# Altium PCB liuyang.PcbDoc (part 1 of 2)
Units mm, origin at the board's own origin, x right, y up, seen from the top; angles counter-clockwise.
Board outline 90.52 x 68.02 mm, 2 copper layers (Top Layer, Bottom Layer); 126 components, 27 nets, 696 pads, 498 vias.
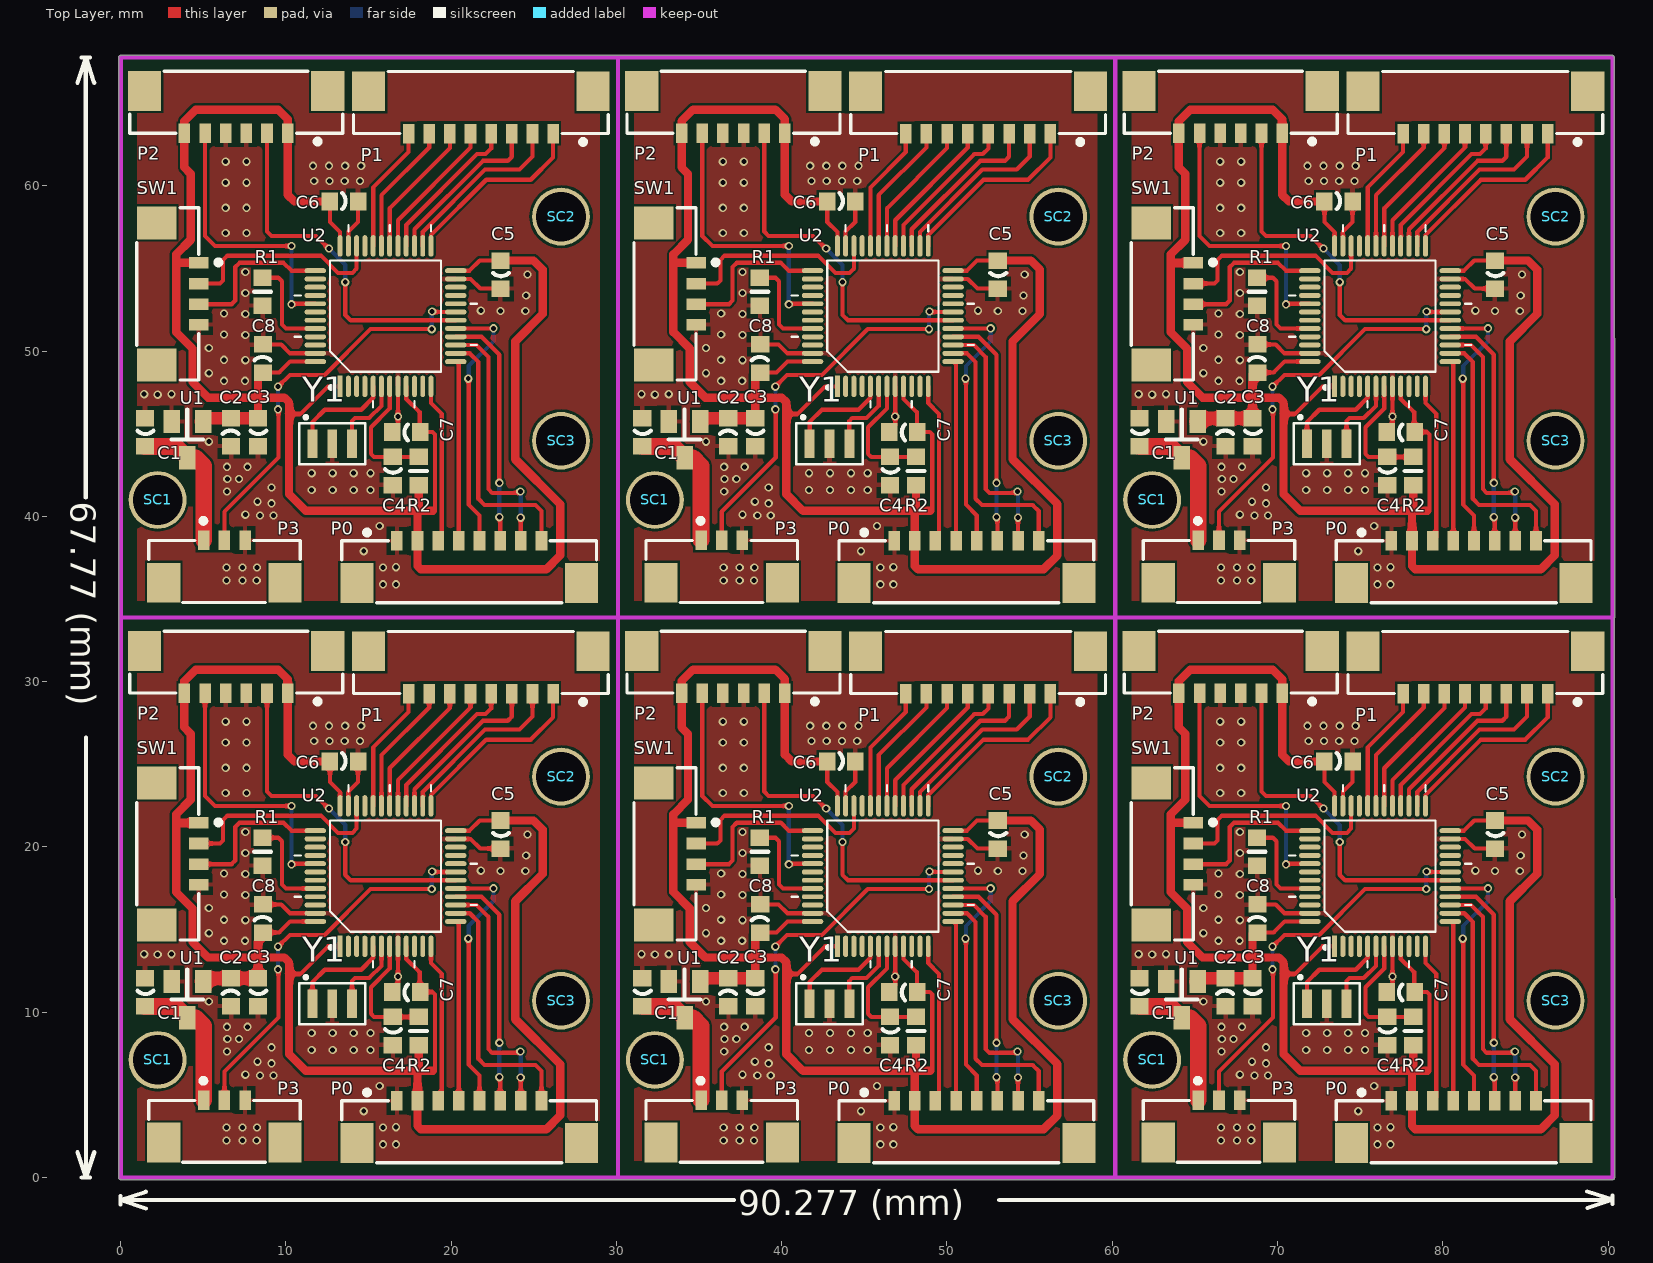
[diagram p0: Top Layer view]
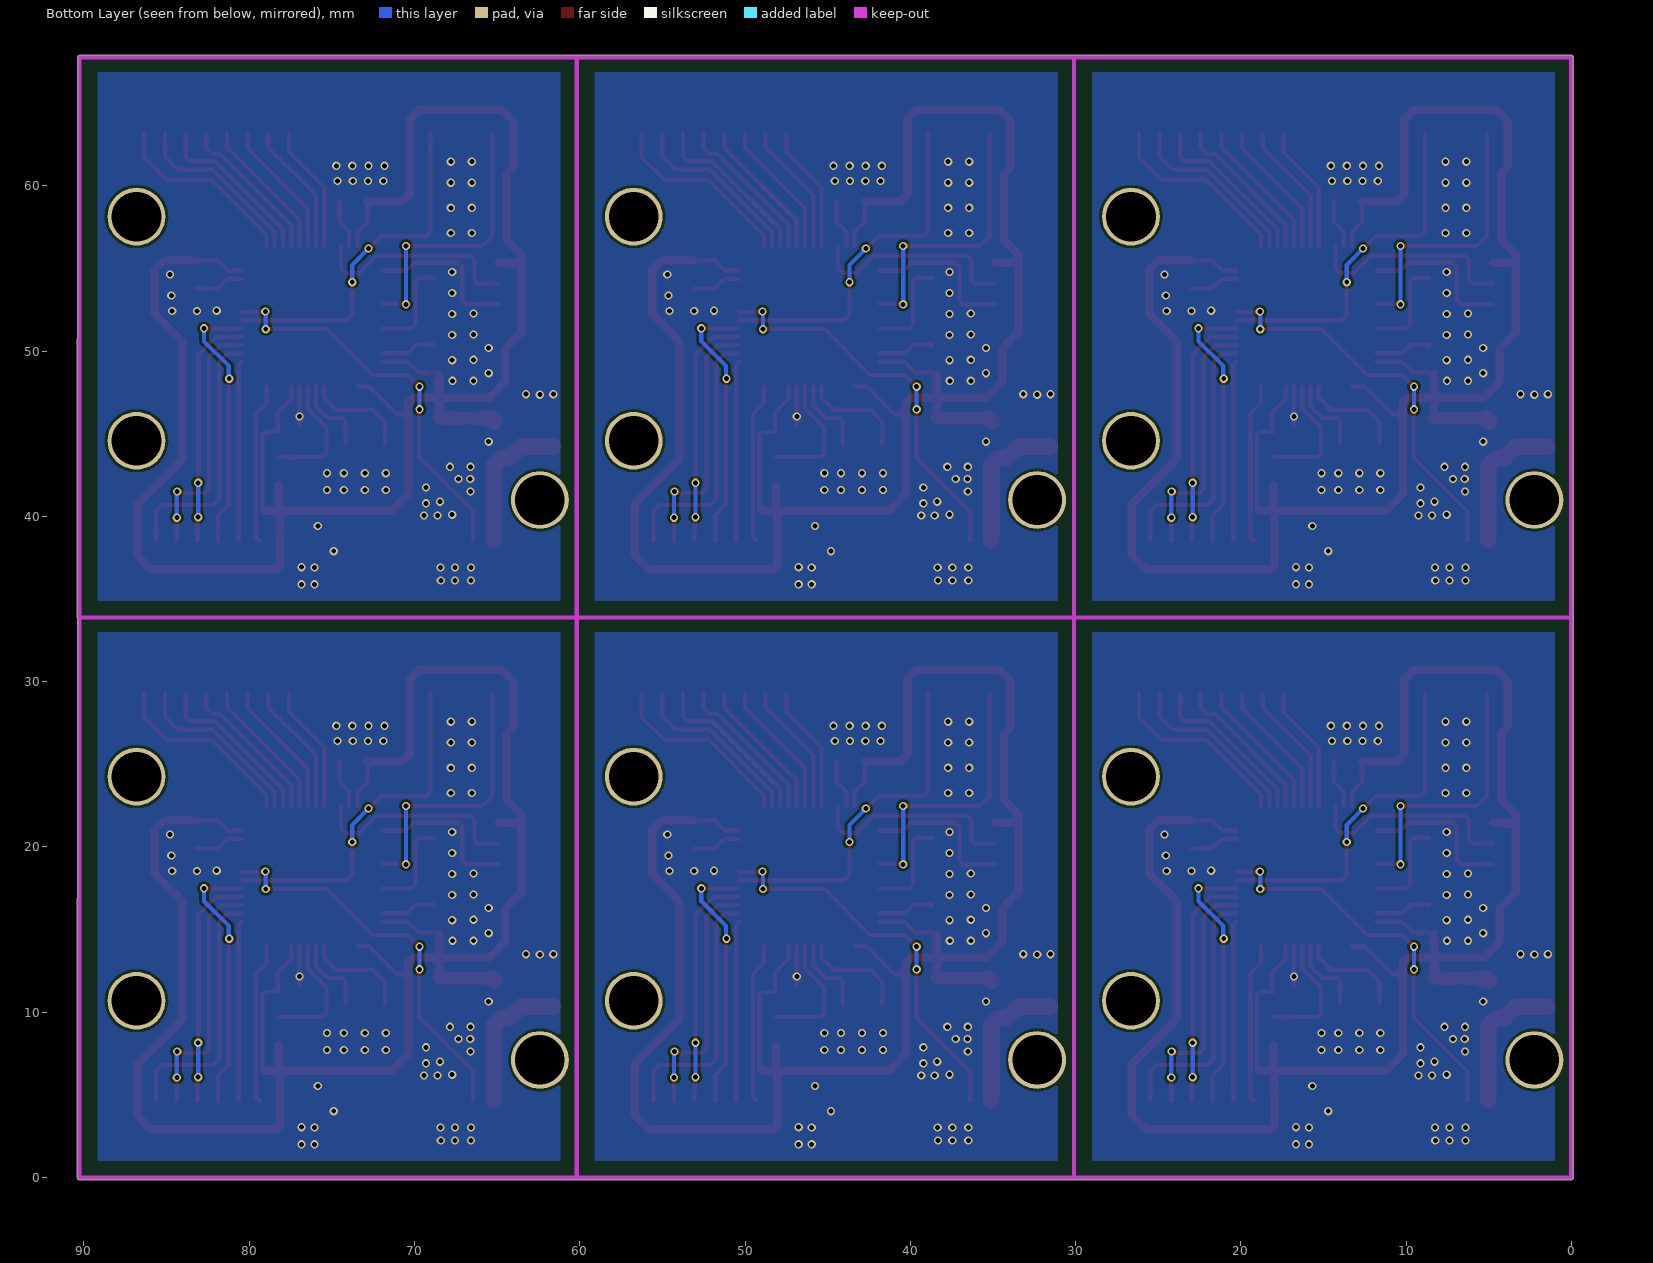
[diagram p1: Bottom Layer view, seen from below]

## Layer stack, top to bottom
Top Solder: solder mask 0.0102, Solder Resist, Dk 3.5
Top Layer: signal copper 0.0356
Dielectric 1: dielectric 0.32, FR-4, Dk 4.8
Bottom Layer: signal copper 0.0356
Bottom Solder: solder mask 0.0102, Solder Resist, Dk 3.5

## Board outline
-0.127,0 ccw(c0,0) 0,-0.127 90.266,-0.127 ccw(c90.266,0) 90.393,0 ccw(c90.266,0) 90.393,0 90.37,33.81 ccw(c90.266,33.884) 90.393,33.884 ccw(c90.266,33.884) 90.393,33.884 90.37,67.767 ccw(c90.242,67.767) 90.242,67.895 60.177,67.895 ccw(c60.177,67.767) 60.165,67.894 ccw(c60.154,67.767) 60.154,67.895 30.089,67.895 ccw(c30.089,67.767) 30.077,67.894 ccw(c30.065,67.767) 30.065,67.895 0,67.895 ccw(c0,67.767) -0.127,67.767

## Design rules (kind name [scope] priority, off if disabled: settings)
Clearance [All] p1: gap=0.152
ComponentClearance [All] p1: gap=0 collisioncheckmode=3 verticalgap=0 showdistances=FALSE
HoleToHoleClearance [All] p1: gap=0 allowstackedmicrovias=TRUE
MinimumSolderMaskSliver [All] p1: minsoldermaskwidth=0
PolygonConnect PolygonConnect_1 [All vs IsVia] p1: connectstyle=Direct reliefconductorwidth=0.254 reliefentries=4 polygonreliefangle="90 Angle" airgapwidth=0.254
PolygonConnect [All] p2: connectstyle=Relief reliefconductorwidth=0.254 reliefentries=4 polygonreliefangle="90 Angle" airgapwidth=0.254
RoutingVias [All] p1: holewidth=0.711 width=1.27 viastyle="Through Hole" minholewidth=0.3 minwidth=0.5 maxholewidth=3 maxwidth=3
SilkToSilkClearance [All] p1: silktosilkclearance=0
SilkToSolderMaskClearance [IsPad] p1: minsilkscreentomaskgap=0 clearancetoexposedcopper=TRUE
SolderMaskExpansion [All] p1: expansion=0.102
Width [All] p1: maxlimit=1.27 minlimit=0.152 preferedwidth=0.254
25 further rules are at their usual default settings.

## Components (designator, comment, footprint, x,y, rotation, side; value= is the part's Value field where it differs from the comment)
C1 "100n" C0603 61.65,45.085 r90 top
C1 "100n" C0603 31.562,45.085 r90 top
C1 "100n" C0603 1.473,45.085 r90 top
C1 "100n" C0603 61.65,11.201 r90 top
C1 "100n" C0603 31.562,11.201 r90 top
C1 "100n" C0603 1.473,11.201 r90 top
C2 "100n" C0603 66.857,45.097 r270 top
C2 "100n" C0603 36.769,45.097 r270 top
C2 "100n" C0603 6.68,45.097 r270 top
C2 "100n" C0603 66.857,11.213 r270 top
C2 "100n" C0603 36.769,11.213 r270 top
C2 "100n" C0603 6.68,11.213 r270 top
C3 "10UF" C0603 68.483,45.085 r90 top
C3 "10UF" C0603 38.394,45.085 r90 top
C3 "10UF" C0603 8.306,45.085 r90 top
C3 "10UF" C0603 68.483,11.201 r90 top
C3 "10UF" C0603 38.394,11.201 r90 top
C3 "10UF" C0603 8.306,11.201 r90 top
C4 "0.1uF" C0603 76.636,42.748 r90 top
C4 "0.1uF" C0603 46.548,42.748 r90 top
C4 "0.1uF" C0603 16.459,42.748 r90 top
C4 "0.1uF" C0603 76.636,8.865 r90 top
C4 "0.1uF" C0603 46.548,8.865 r90 top
C4 "0.1uF" C0603 16.459,8.865 r90 top
C5 "10UF" C0603 83.164,54.635 r90 top
C5 "10UF" C0603 53.076,54.635 r90 top
C5 "10UF" C0603 22.987,54.635 r90 top
C5 "10UF" C0603 83.164,20.752 r90 top
C5 "10UF" C0603 53.076,20.752 r90 top
C5 "10UF" C0603 22.987,20.752 r90 top
C6 "0.1uF" C0603 73.69,59.055 r180 top
C6 "0.1uF" C0603 43.601,59.055 r180 top
C6 "0.1uF" C0603 13.513,59.055 r180 top
C6 "0.1uF" C0603 73.69,25.171 r180 top
C6 "0.1uF" C0603 43.601,25.171 r180 top
C6 "0.1uF" C0603 13.513,25.171 r180 top
C7 "0.1uF" C0603 77.449,45.11 r0 top
C7 "0.1uF" C0603 47.361,45.11 r0 top
C7 "0.1uF" C0603 17.272,45.11 r0 top
C7 "0.1uF" C0603 77.449,11.227 r0 top
C7 "0.1uF" C0603 47.361,11.227 r0 top
C7 "0.1uF" C0603 17.272,11.227 r0 top
C8 "0.1uF" C0603 68.788,49.555 r270 top
C8 "0.1uF" C0603 38.699,49.555 r270 top
C8 "0.1uF" C0603 8.611,49.555 r270 top
C8 "0.1uF" C0603 68.788,15.672 r270 top
C8 "0.1uF" C0603 38.699,15.672 r270 top
C8 "0.1uF" C0603 8.611,15.672 r270 top
P0 "OLED" DF13-1.25-8A 81.264,37.252 r0 top
P0 "OLED" DF13-1.25-8A 51.175,37.252 r0 top
P0 "OLED" DF13-1.25-8A 21.087,37.252 r0 top
P0 "OLED" DF13-1.25-8A 81.264,3.368 r0 top
P0 "OLED" DF13-1.25-8A 51.175,3.368 r0 top
P0 "OLED" DF13-1.25-8A 21.087,3.368 r0 top
P1 "云台" DF13-1.25-8A 81.97,64.44 r180 top
P1 "云台" DF13-1.25-8A 51.882,64.44 r180 top
P1 "云台" DF13-1.25-8A 21.793,64.44 r180 top
P1 "云台" DF13-1.25-8A 81.97,30.556 r180 top
P1 "云台" DF13-1.25-8A 51.882,30.556 r180 top
P1 "云台" DF13-1.25-8A 21.793,30.556 r180 top
P2 "Header 6" DF13-1.25-6A 67.162,64.465 r180 top
P2 "Header 6" DF13-1.25-6A 37.074,64.465 r180 top
P2 "Header 6" DF13-1.25-6A 6.985,64.465 r180 top
P2 "Header 6" DF13-1.25-6A 67.162,30.582 r180 top
P2 "Header 6" DF13-1.25-6A 37.074,30.582 r180 top
P2 "Header 6" DF13-1.25-6A 6.985,30.582 r180 top
P3 "Header 3" DF13-1.25-3A 67.082,37.277 r0 top
P3 "Header 3" DF13-1.25-3A 36.993,37.277 r0 top
P3 "Header 3" DF13-1.25-3A 6.904,37.277 r0 top
P3 "Header 3" DF13-1.25-3A 67.082,3.394 r0 top
P3 "Header 3" DF13-1.25-3A 36.993,3.394 r0 top
P3 "Header 3" DF13-1.25-3A 6.904,3.394 r0 top
R1 "10K" R0603 68.762,53.594 r90 top
R1 "10K" R0603 38.674,53.594 r90 top
R1 "10K" R0603 8.585,53.594 r90 top
R1 "10K" R0603 68.762,19.71 r90 top
R1 "10K" R0603 38.674,19.71 r90 top
R1 "10K" R0603 8.585,19.71 r90 top
R2 "10K" R0603 78.211,42.748 r270 top
R2 "10K" R0603 48.123,42.748 r270 top
R2 "10K" R0603 18.034,42.748 r270 top
R2 "10K" R0603 78.211,8.865 r270 top
R2 "10K" R0603 48.123,8.865 r270 top
R2 "10K" R0603 18.034,8.865 r270 top
SC1 "M3" SCRREW_M3 62.412,40.996 r0 top
SC1 "M3" SCRREW_M3 32.324,40.996 r0 top
SC1 "M3" SCRREW_M3 2.235,40.996 r0 top
SC1 "M3" SCRREW_M3 62.412,7.112 r0 top
SC1 "M3" SCRREW_M3 32.324,7.112 r0 top
SC1 "M3" SCRREW_M3 2.235,7.112 r0 top
SC2 "M3" SCRREW_M3 86.822,58.141 r0 top
SC2 "M3" SCRREW_M3 56.733,58.141 r0 top
SC2 "M3" SCRREW_M3 26.645,58.141 r0 top
SC2 "M3" SCRREW_M3 86.822,24.257 r0 top
SC2 "M3" SCRREW_M3 56.733,24.257 r0 top
SC2 "M3" SCRREW_M3 26.645,24.257 r0 top
SC3 "M3" SCRREW_M3 86.822,44.577 r0 top
SC3 "M3" SCRREW_M3 56.733,44.577 r0 top
SC3 "M3" SCRREW_M3 26.645,44.577 r0 top
SC3 "M3" SCRREW_M3 86.822,10.693 r0 top
SC3 "M3" SCRREW_M3 56.733,10.693 r0 top
SC3 "M3" SCRREW_M3 26.645,10.693 r0 top
SW1 "CON4" DF13-1.25-4A 63.632,53.467 r270 top
SW1 "CON4" DF13-1.25-4A 33.543,53.467 r270 top
SW1 "CON4" DF13-1.25-4A 3.454,53.467 r270 top
SW1 "CON4" DF13-1.25-4A 63.632,19.583 r270 top
SW1 "CON4" DF13-1.25-4A 33.543,19.583 r270 top
SW1 "CON4" DF13-1.25-4A 3.454,19.583 r270 top
U1 "3.3V" SOT23 64.216,44.653 r180 top
U1 "3.3V" SOT23 34.127,44.653 r180 top
U1 "3.3V" SOT23 4.039,44.653 r180 top
U1 "3.3V" SOT23 64.216,10.77 r180 top
U1 "3.3V" SOT23 34.127,10.77 r180 top
U1 "3.3V" SOT23 4.039,10.77 r180 top
U2 "STM32F103C8" ST_LQFP48 76.205,52.121 r90 top
U2 "STM32F103C8" ST_LQFP48 46.116,52.121 r90 top
U2 "STM32F103C8" ST_LQFP48 16.027,52.121 r90 top
U2 "STM32F103C8" ST_LQFP48 76.205,18.237 r90 top
U2 "STM32F103C8" ST_LQFP48 46.116,18.237 r90 top
U2 "STM32F103C8" ST_LQFP48 16.027,18.237 r90 top
Y1 "CSTCE8M00G55R0" CRYSMD3.2X1.3 72.979,44.399 r0 top
Y1 "CSTCE8M00G55R0" CRYSMD3.2X1.3 42.89,44.399 r0 top
Y1 "CSTCE8M00G55R0" CRYSMD3.2X1.3 12.802,44.399 r0 top
Y1 "CSTCE8M00G55R0" CRYSMD3.2X1.3 72.979,10.516 r0 top
Y1 "CSTCE8M00G55R0" CRYSMD3.2X1.3 42.89,10.516 r0 top
Y1 "CSTCE8M00G55R0" CRYSMD3.2X1.3 12.802,10.516 r0 top

## Footprints (in the part's own frame and the unit in brackets; to place one, negate y for a bottom-side part, rotate by r counter-clockwise, add the part's x,y. Pads: shape width x height; smd on the part's side, far side on the other; paste and mask are expansions set on the pad)
C0603 [mm] "C0603"
  rect 1x1.1 smd: 1(-0.85,0) 2(0.85,0)
  Top Layer pour cut-out: -0.356,0.533 -0.356,-0.533 0.356,-0.533 0.356,0.533
  silkscreen extent -0.1,-0.51 0.1,0.46
CRYSMD3.2X1.3 [mm]
  rect 0.6x1.7 smd: 1(-1.2,0) 2(0,0) 3(1.2,0)
  Top Layer pour cut-out: -2.007,1.245 -0.381,1.245 -0.381,-1.27 -2.007,-1.27
  Top Layer pour cut-out: 1.981,1.245 0.406,1.245 0.406,-1.245 1.956,-1.245 1.981,-1.219
  silkscreen extent -2,-1.25 2,1.7
DF13-1.25-3A [mm] "佳能"
  rect 0.7x1.18 smd: 1(-1.875,1.28) 2(-0.625,1.28) 3(0.625,1.28)
  rect 2x2.4 smd: NC(-4.3,-1.28) NC(3.05,-1.28)
  silkscreen extent -5.21,-2.48 3.96,2.61
DF13-1.25-4A [mm] "佳能"
  rect 0.7x1.18 smd: 1(-1.875,1.28) 2(-0.625,1.28) 3(0.625,1.28) 4(1.875,1.28)
  rect 2x2.4 smd: NC(-4.3,-1.28) NC(4.3,-1.28)
  silkscreen extent -5.21,-2.48 5.21,2.61
DF13-1.25-6A [mm]
  rect 0.7x1.18 smd: 1(-3.119,1.28) 2(-1.869,1.28) 3(-0.619,1.28) 4(0.631,1.28) 5(1.881,1.28) 6(3.131,1.28)
  rect 2x2.4 smd: NC(-5.544,-1.28) NC(5.544,-1.28)
  silkscreen extent -6.45,-2.48 6.44,1.93
DF13-1.25-8A [mm]
  rect 0.7x1.18 smd: 1(-4.375,1.28) 2(-3.125,1.28) 3(-1.875,1.28) 4(-0.625,1.28) 5(0.625,1.28) 6(1.875,1.28) 7(3.125,1.28) 8(4.375,1.28)
  rect 2x2.4 smd: NC(-6.8,-1.28) NC(6.8,-1.28)
  silkscreen extent -7.71,-2.48 7.71,1.93
R0603 [mm] "R0603"
  rect 1x1.1 smd: 1(-0.85,0) 2(0.85,0)
  Top Layer pour cut-out: -0.356,0.533 -0.356,-0.533 0.356,-0.533 0.356,0.533
  silkscreen extent 0,-0.51 0,0.51
SCRREW_M3 [mm]
  round 3.5 hole 3: 0(0,0)
SOT23 [mm] "SOT23"
  rect 1x1.4 smd: 1(0.95,-1.1) 2(-0.95,-1.1) 3(0,1.1)
  silkscreen extent -0.94,-1.82 0.97,0
ST_LQFP48 [mm]
  rect 1.3x0.3 smd: 1(-4.25,2.75)
  oval 1.3x0.3 smd: 2(-4.25,2.25) 3(-4.25,1.75) 4(-4.25,1.25) 5(-4.25,0.75) 6(-4.25,0.25) 7(-4.25,-0.25) 8(-4.25,-0.75) 9(-4.25,-1.25) 10(-4.25,-1.75) 11(-4.25,-2.25) 12(-4.25,-2.75) 25(4.25,-2.75) 26(4.25,-2.25) 27(4.25,-1.75) 28(4.25,-1.25) 29(4.25,-0.75) 30(4.25,-0.25) 31(4.25,0.25) 32(4.25,0.75) 33(4.25,1.25) 34(4.25,1.75) 35(4.25,2.25) 36(4.25,2.75)
  oval 0.3x1.3 smd: 13(-2.75,-4.25) 14(-2.25,-4.25) 15(-1.75,-4.25) 16(-1.25,-4.25) 17(-0.75,-4.25) 18(-0.25,-4.25) 19(0.25,-4.25) 20(0.75,-4.25) 21(1.25,-4.25) 22(1.75,-4.25) 23(2.25,-4.25) 24(2.75,-4.25) 37(2.75,4.25) 38(2.25,4.25) 39(1.75,4.25) 40(1.25,4.25) 41(0.75,4.25) 42(0.25,4.25) 43(-0.25,4.25) 44(-0.75,4.25) 45(-1.25,4.25) 46(-1.75,4.25) 47(-2.25,4.25) 48(-2.75,4.25)
  silkscreen extent -5.52,-5.52 5.52,5.52

## Part data
C1 C1 C1 C1 C1 C1 C2 C2 C2 C2 C2 C2: library part C-EUC0603, "CAPACITOR, European symbol"
C3 C3 C3 C3 C3 C3 C4 C4 C4 C4 C4 C4 C5 C5 C5 C5 C5 C5 C6 C6 C6 C6 C6 C6 C7 C7 C7 C7 C7 C7 C8 C8 C8 C8 C8 C8: library part Cap, "Capacitor"
P0 P0 P0 P0 P0 P0 P1 P1 P1 P1 P1 P1: library part "Header 8", "Header, 8-Pin"
P2 P2 P2 P2 P2 P2: "Header, 6-Pin"
P3 P3 P3 P3 P3 P3: "Header, 3-Pin"
R1 R1 R1 R1 R1 R1 R2 R2 R2 R2 R2 R2: library part Res2, "Resistor"
SC1 SC1 SC1 SC1 SC1 SC1 SC2 SC2 SC2 SC2 SC2 SC2 SC3 SC3 SC3 SC3 SC3 SC3: library part Screw_M3, "Screw"
U1 U1 U1 U1 U1 U1: library part XC6206
Y1 Y1 Y1 Y1 Y1 Y1: library part XTAL-3

## Via types
v1: diameter 0.5, hole 0.3, Top Layer to Bottom Layer, tented both sides, 498 vias

## Nets (pads, with @x,y where several pads share a name; then routed paths per layer and width w, separated by ;. In a path a pad name is that pad's centre, name@x,y a point inside that pad or via, vN(x,y) a via of type N, cw(c..) or ccw(c..) an arc to the next point about the centre after c; other vN are vias at no path point)
BL: P0.3@19.212,4.648 U2.12@18.777,13.987 | length 9.7
  Top Layer w0.254: U2.12@18.777,13.987 18.777,12.973 19.431,12.319 19.431,4.867 P0.3@19.212,4.648
CS: P0.8@25.461,4.648 U2.14@20.277,15.987 | length 15.8
  Top Layer w0.254: U2.14@20.277,15.987 21.122,15.987 21.641,15.469 21.641,7.188 22.022,6.807 25.095,6.807 25.461,6.441 P0.8@25.461,4.648
GND: C1.2@1.473,12.051 C2.2@6.68,10.363 C3.1@8.306,10.352 C4.1@16.459,8.015 C5.1@22.987,19.902 C6.1@14.363,25.171 C7.1@16.422,11.227 C8.1@8.611,16.522 P0.1@16.712,4.648 P2.3@7.604,29.302 P2.4@6.354,29.302 P3.3@7.529,4.674 R1.1@8.585,18.861 SW1.4@4.734,17.708 U1.1@3.089,11.87 U2.8@16.777,13.987 U2.23@20.277,20.487 U2.35@13.777,22.487 U2.47@11.777,15.987 Y1.2@12.802,10.516 | length 11.8
  Top Layer w0.254: C8.1@8.611,16.42 C8.1@8.712,16.522 ; C8.1@8.611,16.522 C8.1@8.712,16.522 ; U2.47@11.777,15.987 10.251,15.987 9.717,16.522 C8.1@8.712,16.522 ; U2.35@13.777,22.487 13.777,23.353 14.363,23.938 C6.1@14.363,25.171 ; C7.1@16.777,11.633 v1(16.777,12.167) U2.8@16.777,13.987 ; U2.23@20.277,20.487 21.169,20.487 21.754,19.902 C5.1@22.987,19.902
  other v1: 15.875,2.007 16.662,2.007 6.401,2.235 7.366,2.235 8.23,2.235 6.401,3.023 7.366,3.023 8.255,3.023 15.875,3.023 16.662,3.048 14.707,4.013 15.672,5.537 8.433,6.172 9.246,6.172 7.544,6.223 9.119,6.909 8.28,7.01 6.426,7.62 11.557,7.722 12.827,7.722 14.097,7.722 15.113,7.722 9.119,7.874 6.452,8.382 7.163,8.382 11.557,8.738 12.827,8.738 14.097,8.738 15.113,8.738 6.426,9.119 7.671,9.119 5.334,10.643 2.235,13.487 1.422,13.513 3.073,13.513 6.248,14.326 7.518,14.326 5.334,14.783 7.544,15.57 6.248,15.596 5.334,16.307 7.544,17.094 6.248,17.12 7.544,18.364 6.248,18.39 22.987,18.542 24.486,18.542 21.793,18.567 24.536,19.482 7.544,19.634 24.613,20.752 7.544,20.904 6.35,23.266 7.62,23.266 6.35,24.79 7.62,24.79 6.35,26.314 7.62,26.314 11.709,26.416 12.632,26.416 13.555,26.416 14.478,26.416 11.633,27.33 12.607,27.33 13.581,27.33 14.554,27.33 6.35,27.584 7.62,27.584
MISO: P0.6@22.962,4.648 U2.16@20.277,16.987 | length 14.4
  Top Layer w0.254: U2.16@20.277,16.987 21.824,16.987 22.911,15.9 v1(22.911,8.153) ; v1(22.911,6.071) 22.962,6.02 P0.6@22.962,4.648
  Bottom Layer w0.254: v1(22.911,6.071) v1(22.911,8.153)
MOSI: P0.5@21.712,4.648 U2.17@20.277,17.487 | length 16
  Top Layer w0.254: U2.17@20.277,17.487 22.542,17.487 v1(22.555,17.501) ; v1(21.031,14.453) 21.057,14.427 21.057,6.833 21.712,6.178 P0.5@21.712,4.648
  Bottom Layer w0.254: v1(21.031,14.453) 21.057,14.478 21.057,15.215 22.555,16.713 v1(22.555,17.501)
NetR1_2: R1.2@8.585,20.56 U2.44@11.777,17.487 | length 6
  Top Layer w0.254: R1.2@8.585,20.56 9.539,20.56 9.754,20.345 9.754,17.729 9.996,17.487 U2.44@11.777,17.487
NetU2_5: U2.5@15.277,13.987 Y1.1@11.602,10.516 | length 6.3
  Top Layer w0.254: Y1.1@11.602,10.516 11.602,11.83 12.344,12.573 14.554,12.573 15.277,13.296 U2.5@15.277,13.987
NetU2_6: U2.6@15.777,13.987 Y1.3@14.002,10.516 | length 4.7
  Top Layer w0.254: Y1.3@14.002,10.516 14.002,11.893 14.173,12.065 15.037,12.065 15.777,12.806 U2.6@15.777,13.987
PA8: P1.5@21.168,29.276 U2.29@16.777,22.487 | length 8.6
  Top Layer w0.254: U2.29@16.777,22.487 16.777,24.042 21.168,28.433 P1.5@21.168,29.276
PA11: P1.8@17.418,29.276 U2.32@15.277,22.487 | length 7.7
  Top Layer w0.254: U2.32@15.277,22.487 15.277,26.022 17.418,28.163 P1.8@17.418,29.276
PA12: U2.33@14.777,22.487
PB12: P1.1@26.168,29.276 U2.25@18.777,22.487 | length 11.4
  Top Layer w0.254: U2.25@18.777,22.487 18.777,23.146 22.123,26.492 24.816,26.492 26.168,27.845 P1.1@26.168,29.276
PB13: P1.2@24.918,29.276 U2.26@18.277,22.487 | length 10.8
  Top Layer w0.254: U2.26@18.277,22.487 18.277,23.332 22.047,27.102 24.13,27.102 24.918,27.89 P1.2@24.918,29.276
PB14: P1.3@23.668,29.276 U2.27@17.777,22.487 | length 10.1
  Top Layer w0.254: U2.27@17.777,22.487 17.777,23.492 21.92,27.635 23.419,27.635 23.668,27.884 P1.3@23.668,29.276
PB15: P1.4@22.418,29.276 U2.28@17.277,22.487 | length 9.2
  Top Layer w0.254: U2.28@17.277,22.487 17.277,23.754 21.565,28.042 22.073,28.042 22.418,28.387 P1.4@22.418,29.276
POT: P2.2@8.854,29.302 U2.18@20.277,17.987 | length 21.4
  Top Layer w0.254: P2.2@8.854,29.302 8.854,23.354 9.119,23.089 11.811,23.089 12.573,22.327 v1(12.598,22.327) ; v1(13.589,20.295) 13.589,18.313 13.915,17.987 U2.18@20.277,17.987
  Bottom Layer w0.254: v1(12.598,22.327) 13.589,21.336 v1(13.589,20.295)
PWN0: P3.2@6.279,4.674 U2.19@20.277,18.487 | length 23.9
  Top Layer w0.254: P3.2@6.279,4.674 6.279,6.406 9.55,9.677 9.55,12.598 v1(9.525,12.598) ; v1(9.525,13.97) 10.236,14.681 12.344,14.681 15.113,17.45 v1(18.821,17.45) ; v1(18.847,18.517) 18.876,18.487 U2.19@20.277,18.487
  Bottom Layer w0.254: v1(9.525,12.598) v1(9.525,13.97) ; v1(18.821,17.45) 18.821,18.517 v1(18.847,18.517)
REST1: C4.2@16.459,9.714 R2.1@18.034,9.714 U2.7@16.277,13.987 | length 7.5
  Top Layer w0.254: U2.7@16.277,13.987 16.277,12.649 15.138,11.51 15.138,9.906 15.33,9.714 C4.2@16.434,9.714 ; C4.2@16.459,9.714 R2.1@18.034,9.714
RS: P0.4@20.462,4.648 U2.13@20.277,15.487 | length 10.9
  Top Layer w0.254: U2.13@20.277,15.487 20.462,15.303 P0.4@20.462,4.648
RX1: P1.7@18.668,29.276 U2.31@15.777,22.487 | length 8
  Top Layer w0.254: U2.31@15.777,22.487 15.777,25.556 18.668,28.447 P1.7@18.668,29.276
SCK: P0.7@24.212,4.648 U2.15@20.277,16.487 | length 15.4
  Top Layer w0.254: U2.15@20.277,16.487 21.537,16.487 22.25,15.773 22.25,7.772 22.479,7.544 24.181,7.544 v1(24.181,7.62) ; v1(24.206,6.045) 24.206,4.654 P0.7@24.212,4.648
  Bottom Layer w0.254: v1(24.181,7.62) 24.206,7.62 v1(24.206,6.045)
SPEED: P2.5@5.104,29.302 U2.41@11.777,18.987 | length 16.7
  Top Layer w0.254: P2.5@5.104,29.302 5.104,23.09 5.715,22.479 v1(10.338,22.479) ; v1(10.338,18.948) 10.377,18.987 U2.41@11.777,18.987
  Bottom Layer w0.254: v1(10.338,18.948) v1(10.338,22.479)
SWCLK: SW1.3@4.734,18.958 U2.37@11.777,20.987 | length 9.5
  Top Layer w0.254: SW1.3@4.734,18.958 6.716,18.958 6.934,19.177 6.934,21.209 7.188,21.463 9.855,21.463 10.331,20.987 U2.37@11.777,20.987
SWDIO: SW1.2@4.734,20.208 U2.34@14.277,22.487 | length 12.9
  Top Layer w0.254: SW1.2@4.734,20.208 6.01,20.208 6.198,20.396 6.198,21.641 6.452,21.895 12.116,21.895 13.157,20.853 14.021,20.853 14.277,21.11 U2.34@14.277,22.487
TX1: P1.6@19.918,29.276 U2.30@16.277,22.487 | length 8.3
  Top Layer w0.254: U2.30@16.277,22.487 16.277,24.761 19.918,28.402 P1.6@19.918,29.276
VDD_3V3: C2.1@6.68,12.063 C3.2@8.306,12.051 C5.2@22.987,21.602 C6.2@12.663,25.171 C7.2@18.122,11.227 C8.2@8.611,14.822 P0.2@17.962,4.648 P2.1@10.104,29.302 P2.6@3.854,29.302 R2.2@18.034,8.015 SW1.1@4.734,21.459 U1.2@4.989,11.87 U2.1@13.277,13.987 U2.9@17.277,13.987 U2.24@20.277,20.987 U2.36@13.277,22.487 U2.48@11.777,15.487 | length 117.1
  Top Layer w0.254: C8.2@8.611,14.822 9.59,14.822 10.255,15.487 U2.48@11.777,15.487 ; 10.185,12.319 10.871,12.319 12.539,13.987 U2.1@13.277,13.987 ; C6.2@12.663,25.171 12.663,23.938 13.277,23.324 U2.36@13.277,22.487 ; U2.9@17.277,13.987 17.277,13.228 18.071,12.434 ; C7.2@18.096,11.227 18.096,12.434 ; C7.2@18.122,11.227 18.872,11.227 19.025,11.074 19.025,6.452 ; U2.24@20.277,20.987 21.114,20.987 21.729,21.602 C5.2@22.987,21.602
  Top Layer w0.508: SW1.1@4.734,21.459 3.433,21.459 3.353,21.539 ; C3.2@8.306,12.051 8.306,13.31 ; C8.2@8.306,14.732 8.306,13.31 ; C6.2@12.663,25.171 10.516,25.171 10.104,25.583 P2.1@10.104,29.302 10.104,30.155 9.525,30.734 4.547,30.734 3.854,30.041 P2.6@3.854,29.302 3.854,27.236 4.242,26.848 4.242,22.86 3.353,21.971 3.353,21.539 ; R2.2@18.034,8.015 18.034,6.579 18.161,6.452 ; 18.898,6.452 18.161,6.452 ; C5.2@22.987,21.602 24.982,21.602 25.527,21.057 25.527,18.364 23.876,16.713 23.876,9.576 26.594,6.858 26.594,3.759 25.756,2.921 18.161,2.921 17.962,3.12 P0.2@17.962,4.648 17.962,6.371 17.882,6.452 ; 3.353,21.539 3.353,17.272 4.343,16.281 4.343,14.249 5.283,13.31 8.306,13.31 ; 8.306,13.31 9.906,13.31 10.185,13.03 10.185,12.319 10.185,7.468 11.201,6.452 17.882,6.452 ; 17.882,6.452 18.161,6.452
  Top Layer w0.762: U1.2@5.17,12.051 C3.2@8.306,12.051
  Top Layer w1.016: U1.2@4.989,11.87 U1.2@5.17,12.051
VIN: C1.1@1.473,10.352 P3.1@5.029,4.674 U1.3@4.039,9.67 | length 8.5
  Top Layer w1.016: C1.1@1.473,10.352 3.357,10.352 U1.3@4.039,9.67 4.529,9.67 5.029,9.169 P3.1@5.029,4.674
pads on no net: C1.1@1.473,44.235 C1.1@31.562,10.352 C1.1@31.562,44.235 C1.1@61.65,10.352 C1.1@61.65,44.235 C1.2@1.473,45.935 C1.2@31.562,12.051 C1.2@31.562,45.935 C1.2@61.65,12.051 C1.2@61.65,45.935 C2.1@6.68,45.947 C2.1@36.769,12.063 C2.1@36.769,45.947 C2.1@66.857,12.063 C2.1@66.857,45.947 C2.2@6.68,44.247 C2.2@36.769,10.363 C2.2@36.769,44.247 C2.2@66.857,10.363 C2.2@66.857,44.247 C3.1@8.306,44.235 C3.1@38.394,10.352 C3.1@38.394,44.235 C3.1@68.483,10.352 C3.1@68.483,44.235 C3.2@8.306,45.935 C3.2@38.394,12.051 C3.2@38.394,45.935 C3.2@68.483,12.051 C3.2@68.483,45.935 C4.1@16.459,41.898 C4.1@46.548,8.015 C4.1@46.548,41.898 C4.1@76.636,8.015 C4.1@76.636,41.898 C4.2@16.459,43.598 C4.2@46.548,9.714 C4.2@46.548,43.598 C4.2@76.636,9.714 C4.2@76.636,43.598 C5.1@22.987,53.786 C5.1@53.076,19.902 C5.1@53.076,53.786 C5.1@83.164,19.902 C5.1@83.164,53.786 C5.2@22.987,55.485 C5.2@53.076,21.602 C5.2@53.076,55.485 C5.2@83.164,21.602 C5.2@83.164,55.485 C6.1@14.363,59.055 C6.1@44.451,25.171 C6.1@44.451,59.055 C6.1@74.54,25.171 C6.1@74.54,59.055 C6.2@12.663,59.055 C6.2@42.752,25.171 C6.2@42.752,59.055 C6.2@72.84,25.171 C6.2@72.84,59.055 C7.1@16.422,45.11 C7.1@46.511,11.227 C7.1@46.511,45.11 C7.1@76.599,11.227 C7.1@76.599,45.11 C7.2@18.122,45.11 C7.2@48.211,11.227 C7.2@48.211,45.11 C7.2@78.299,11.227 C7.2@78.299,45.11 C8.1@8.611,50.405 C8.1@38.699,16.522 C8.1@38.699,50.405 C8.1@68.788,16.522 C8.1@68.788,50.405 C8.2@8.611,48.706 C8.2@38.699,14.822 C8.2@38.699,48.706 C8.2@68.788,14.822 C8.2@68.788,48.706 P0.1@16.712,38.532 P0.1@46.8,4.648 P0.1@46.8,38.532 P0.1@76.889,4.648 P0.1@76.889,38.532 P0.2@17.962,38.532 P0.2@48.051,4.648 P0.2@48.051,38.532 P0.2@78.139,4.648 P0.2@78.139,38.532 P0.3@19.212,38.532 P0.3@49.3,4.648 P0.3@49.3,38.532 P0.3@79.389,4.648 P0.3@79.389,38.532 P0.4@20.462,38.532 P0.4@50.55,4.648 P0.4@50.55,38.532 P0.4@80.639,4.648 P0.4@80.639,38.532 P0.5@21.712,38.532 P0.5@51.8,4.648 P0.5@51.8,38.532 P0.5@81.889,4.648 P0.5@81.889,38.532 P0.6@22.962,38.532 P0.6@53.05,4.648 P0.6@53.05,38.532 P0.6@83.139,4.648 P0.6@83.139,38.532 P0.7@24.212,38.532 P0.7@54.3,4.648 P0.7@54.3,38.532 P0.7@84.389,4.648 P0.7@84.389,38.532 P0.8@25.461,38.532 P0.8@55.55,4.648 P0.8@55.55,38.532 P0.8@85.639,4.648 P0.8@85.639,38.532 P0.NC P1.1@26.168,63.16 P1.1@56.257,29.276 P1.1@56.257,63.16 P1.1@86.345,29.276 P1.1@86.345,63.16 P1.2@24.918,63.16 P1.2@55.007,29.276 P1.2@55.007,63.16 P1.2@85.095,29.276 P1.2@85.095,63.16 P1.3@23.668,63.16 P1.3@53.757,29.276 P1.3@53.757,63.16 P1.3@83.845,29.276 P1.3@83.845,63.16 P1.4@22.418,63.16 P1.4@52.507,29.276 P1.4@52.507,63.16 P1.4@82.595,29.276 P1.4@82.595,63.16 P1.5@21.168,63.16 P1.5@51.257,29.276 P1.5@51.257,63.16 P1.5@81.346,29.276 P1.5@81.346,63.16 P1.6@19.918,63.16 P1.6@50.007,29.276 P1.6@50.007,63.16 P1.6@80.096,29.276 P1.6@80.096,63.16 P1.7@18.668,63.16 P1.7@48.757,29.276 P1.7@48.757,63.16 P1.7@78.846,29.276 P1.7@78.846,63.16 P1.8@17.418,63.16 P1.8@47.507,29.276 P1.8@47.507,63.16 P1.8@77.596,29.276 P1.8@77.596,63.16 P1.NC P2.1@10.104,63.185 P2.1@40.193,29.302 P2.1@40.193,63.185 P2.1@70.281,29.302 P2.1@70.281,63.185 P2.2@8.854,63.185 P2.2@38.942,29.302 P2.2@38.942,63.185 P2.2@69.031,29.302 P2.2@69.031,63.185 P2.3@7.604,63.185 P2.3@37.692,29.302 P2.3@37.692,63.185 P2.3@67.781,29.302 P2.3@67.781,63.185 P2.4@6.354,63.185 P2.4@36.442,29.302 P2.4@36.442,63.185 P2.4@66.531,29.302 P2.4@66.531,63.185 P2.5@5.104,63.185 P2.5@35.193,29.302 P2.5@35.193,63.185 P2.5@65.281,29.302 P2.5@65.281,63.185 P2.6@3.854,63.185 P2.6@33.943,29.302 P2.6@33.943,63.185 P2.6@64.031,29.302 P2.6@64.031,63.185 P2.NC P3.1@5.029,38.557 P3.1@35.118,4.674 P3.1@35.118,38.557 P3.1@65.206,4.674 P3.1@65.206,38.557 P3.2@6.279,38.557 P3.2@36.368,4.674 P3.2@36.368,38.557 P3.2@66.457,4.674 P3.2@66.457,38.557 P3.3@7.529,38.557 P3.3@37.618,4.674 P3.3@37.618,38.557 P3.3@67.707,4.674 P3.3@67.707,38.557 P3.NC R1.1@8.585,52.744 R1.1@38.674,18.861 R1.1@38.674,52.744 R1.1@68.762,18.861 R1.1@68.762,52.744 R1.2@8.585,54.444 R1.2@38.674,20.56 R1.2@38.674,54.444 R1.2@68.762,20.56 R1.2@68.762,54.444 R2.1@18.034,43.598 R2.1@48.123,9.714 R2.1@48.123,43.598 R2.1@78.211,9.714 R2.1@78.211,43.598 R2.2@18.034,41.898 R2.2@48.123,8.015 R2.2@48.123,41.898 R2.2@78.211,8.015 R2.2@78.211,41.898 SC1.0 SC2.0 SC3.0 SW1.1@4.734,55.342 SW1.1@34.823,21.459 SW1.1@34.823,55.342 SW1.1@64.912,21.459 SW1.1@64.912,55.342 SW1.2@4.734,54.092 SW1.2@34.823,20.208 SW1.2@34.823,54.092 SW1.2@64.912,20.208 SW1.2@64.912,54.092 SW1.3@4.734,52.842 SW1.3@34.823,18.958 SW1.3@34.823,52.842 SW1.3@64.912,18.958 SW1.3@64.912,52.842 SW1.4@4.734,51.592 SW1.4@34.823,17.708 SW1.4@34.823,51.592 SW1.4@64.912,17.708 SW1.4@64.912,51.592 SW1.NC U1.1@3.089,45.753 U1.1@33.177,11.87 U1.1@33.177,45.753 U1.1@63.266,11.87 U1.1@63.266,45.753 U1.2@4.989,45.753 U1.2@35.077,11.87 U1.2@35.077,45.753 U1.2@65.166,11.87 U1.2@65.166,45.753 U1.3@4.039,43.553 U1.3@34.127,9.67 U1.3@34.127,43.553 U1.3@64.216,9.67 U1.3@64.216,43.553 U2.1@13.277,47.871 U2.1@43.366,13.987 U2.1@43.366,47.871 U2.1@73.455,13.987 U2.1@73.455,47.871 U2.2 U2.3 U2.4 U2.5@15.277,47.871 U2.5@45.366,13.987 U2.5@45.366,47.871 U2.5@75.455,13.987 U2.5@75.455,47.871 U2.6@15.777,47.871 U2.6@45.866,13.987 U2.6@45.866,47.871 U2.6@75.955,13.987 U2.6@75.955,47.871 U2.7@16.277,47.871 U2.7@46.366,13.987 U2.7@46.366,47.871 U2.7@76.455,13.987 U2.7@76.455,47.871 U2.8@16.777,47.871 U2.8@46.866,13.987 U2.8@46.866,47.871 U2.8@76.955,13.987 U2.8@76.955,47.871 U2.9@17.277,47.871 U2.9@47.366,13.987 U2.9@47.366,47.871 U2.9@77.455,13.987 U2.9@77.455,47.871 U2.10 U2.11 U2.12@18.777,47.871 U2.12@48.866,13.987 U2.12@48.866,47.871 U2.12@78.955,13.987 U2.12@78.955,47.871 U2.13@20.277,49.371 U2.13@50.366,15.487 U2.13@50.366,49.371 U2.13@80.455,15.487 U2.13@80.455,49.371 U2.14@20.277,49.871 U2.14@50.366,15.987 U2.14@50.366,49.871 U2.14@80.455,15.987 U2.14@80.455,49.871 U2.15@20.277,50.371 U2.15@50.366,16.487 U2.15@50.366,50.371 U2.15@80.455,16.487 U2.15@80.455,50.371 U2.16@20.277,50.871 U2.16@50.366,16.987 U2.16@50.366,50.871 U2.16@80.455,16.987 U2.16@80.455,50.871 U2.17@20.277,51.371 U2.17@50.366,17.487 U2.17@50.366,51.371 U2.17@80.455,17.487 U2.17@80.455,51.371 U2.18@20.277,51.871 U2.18@50.366,17.987 U2.18@50.366,51.871 U2.18@80.455,17.987 U2.18@80.455,51.871 U2.19@20.277,52.371 U2.19@50.366,18.487 U2.19@50.366,52.371 U2.19@80.455,18.487 U2.19@80.455,52.371 U2.20 U2.21 U2.22 U2.23@20.277,54.371 U2.23@50.366,20.487 U2.23@50.366,54.371 U2.23@80.455,20.487 U2.23@80.455,54.371 U2.24@20.277,54.871 U2.24@50.366,20.987 U2.24@50.366,54.871 U2.24@80.455,20.987 U2.24@80.455,54.871 U2.25@18.777,56.371 U2.25@48.866,22.487 U2.25@48.866,56.371 U2.25@78.955,22.487 U2.25@78.955,56.371 U2.26@18.277,56.371 U2.26@48.366,22.487 U2.26@48.366,56.371 U2.26@78.455,22.487 U2.26@78.455,56.371 U2.27@17.777,56.371 U2.27@47.866,22.487 U2.27@47.866,56.371 U2.27@77.955,22.487 U2.27@77.955,56.371 U2.28@17.277,56.371 U2.28@47.366,22.487 U2.28@47.366,56.371 U2.28@77.455,22.487 U2.28@77.455,56.371 U2.29@16.777,56.371 U2.29@46.866,22.487 U2.29@46.866,56.371 U2.29@76.955,22.487 U2.29@76.955,56.371 U2.30@16.277,56.371 U2.30@46.366,22.487 U2.30@46.366,56.371 U2.30@76.455,22.487 U2.30@76.455,56.371 U2.31@15.777,56.371 U2.31@45.866,22.487 U2.31@45.866,56.371 U2.31@75.955,22.487 U2.31@75.955,56.371 U2.32@15.277,56.371 U2.32@45.366,22.487 U2.32@45.366,56.371 U2.32@75.455,22.487 U2.32@75.455,56.371 U2.33@14.777,56.371 U2.33@44.866,22.487 U2.33@44.866,56.371 U2.33@74.955,22.487 U2.33@74.955,56.371 U2.34@14.277,56.371 U2.34@44.366,22.487 U2.34@44.366,56.371 U2.34@74.455,22.487 U2.34@74.455,56.371 U2.35@13.777,56.371 U2.35@43.866,22.487 U2.35@43.866,56.371 U2.35@73.955,22.487 U2.35@73.955,56.371 U2.36@13.277,56.371 U2.36@43.366,22.487 U2.36@43.366,56.371 U2.36@73.455,22.487 U2.36@73.455,56.371 U2.37@11.777,54.871 U2.37@41.866,20.987 U2.37@41.866,54.871 U2.37@71.955,20.987 U2.37@71.955,54.871 U2.38 U2.39 U2.40 U2.41@11.777,52.871 U2.41@41.866,18.987 U2.41@41.866,52.871 U2.41@71.955,18.987 U2.41@71.955,52.871 U2.42 U2.43 U2.44@11.777,51.371 U2.44@41.866,17.487 U2.44@41.866,51.371 U2.44@71.955,17.487 U2.44@71.955,51.371 U2.45 U2.46 U2.47@11.777,49.871 U2.47@41.866,15.987 U2.47@41.866,49.871 U2.47@71.955,15.987 U2.47@71.955,49.871 U2.48@11.777,49.371 U2.48@41.866,15.487 U2.48@41.866,49.371 U2.48@71.955,15.487 U2.48@71.955,49.371 Y1.1@11.602,44.399 Y1.1@41.69,10.516 Y1.1@41.69,44.399 Y1.1@71.779,10.516 Y1.1@71.779,44.399 Y1.2@12.802,44.399 Y1.2@42.89,10.516 Y1.2@42.89,44.399 Y1.2@72.979,10.516 Y1.2@72.979,44.399 Y1.3@14.002,44.399 Y1.3@44.09,10.516 Y1.3@44.09,44.399 Y1.3@74.179,10.516 Y1.3@74.179,44.399